# Altium PCB board.PcbDoc
Units mm, origin at the board's own origin, x right, y up, seen from the top; angles counter-clockwise.
Board outline 123 x 60 mm, 2 copper layers (Top Layer, Bottom Layer); 14 components, 7 nets, 45 pads, 1 vias.
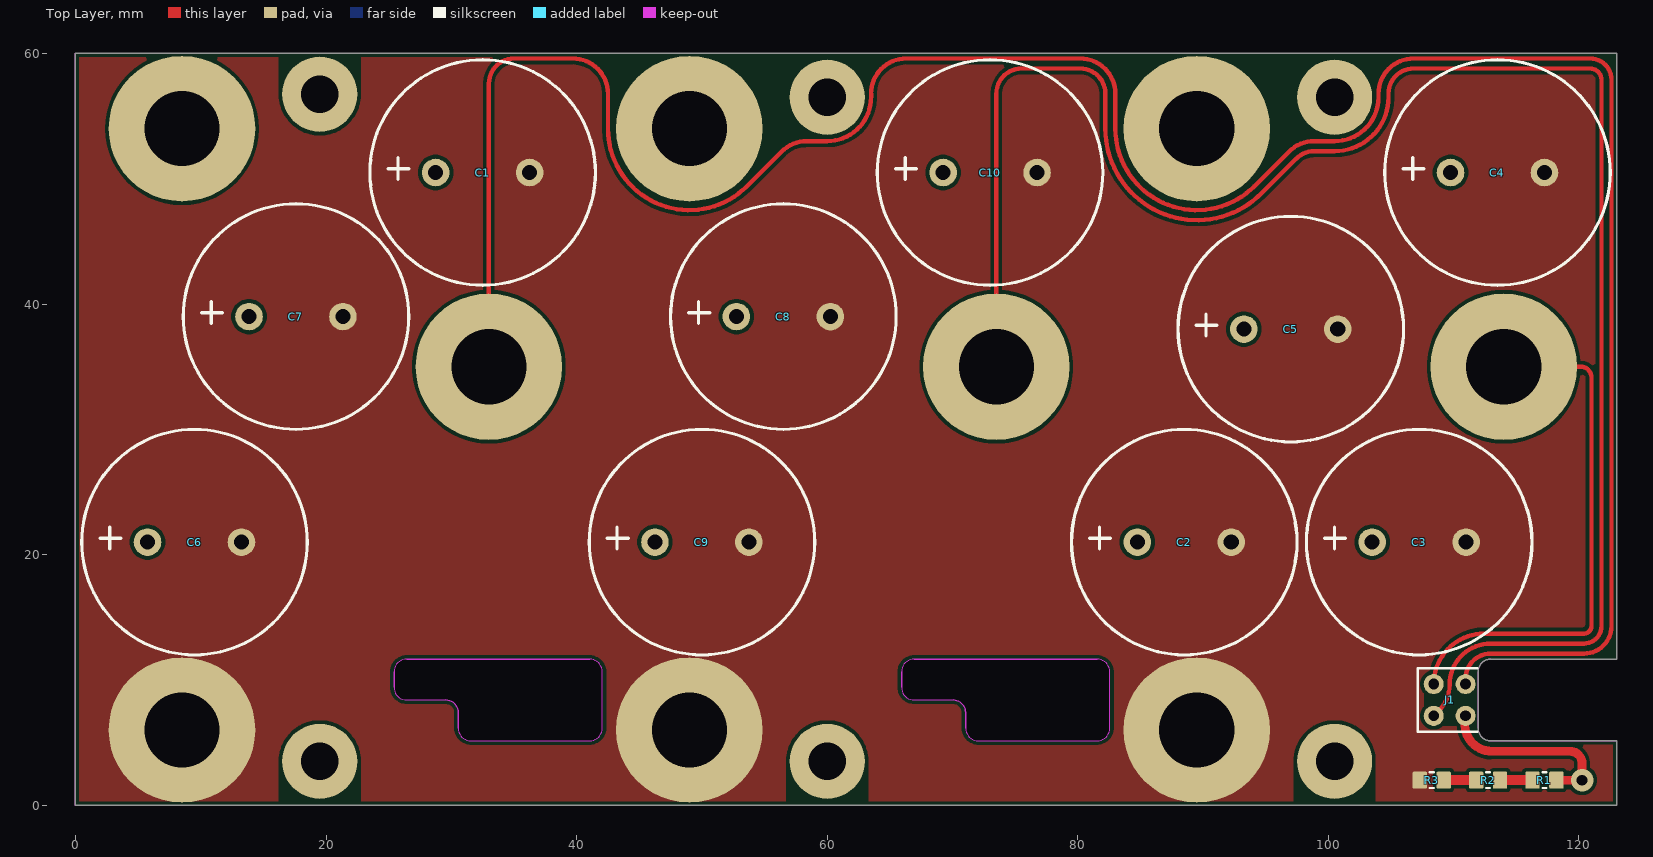
[diagram p0: Top Layer view]
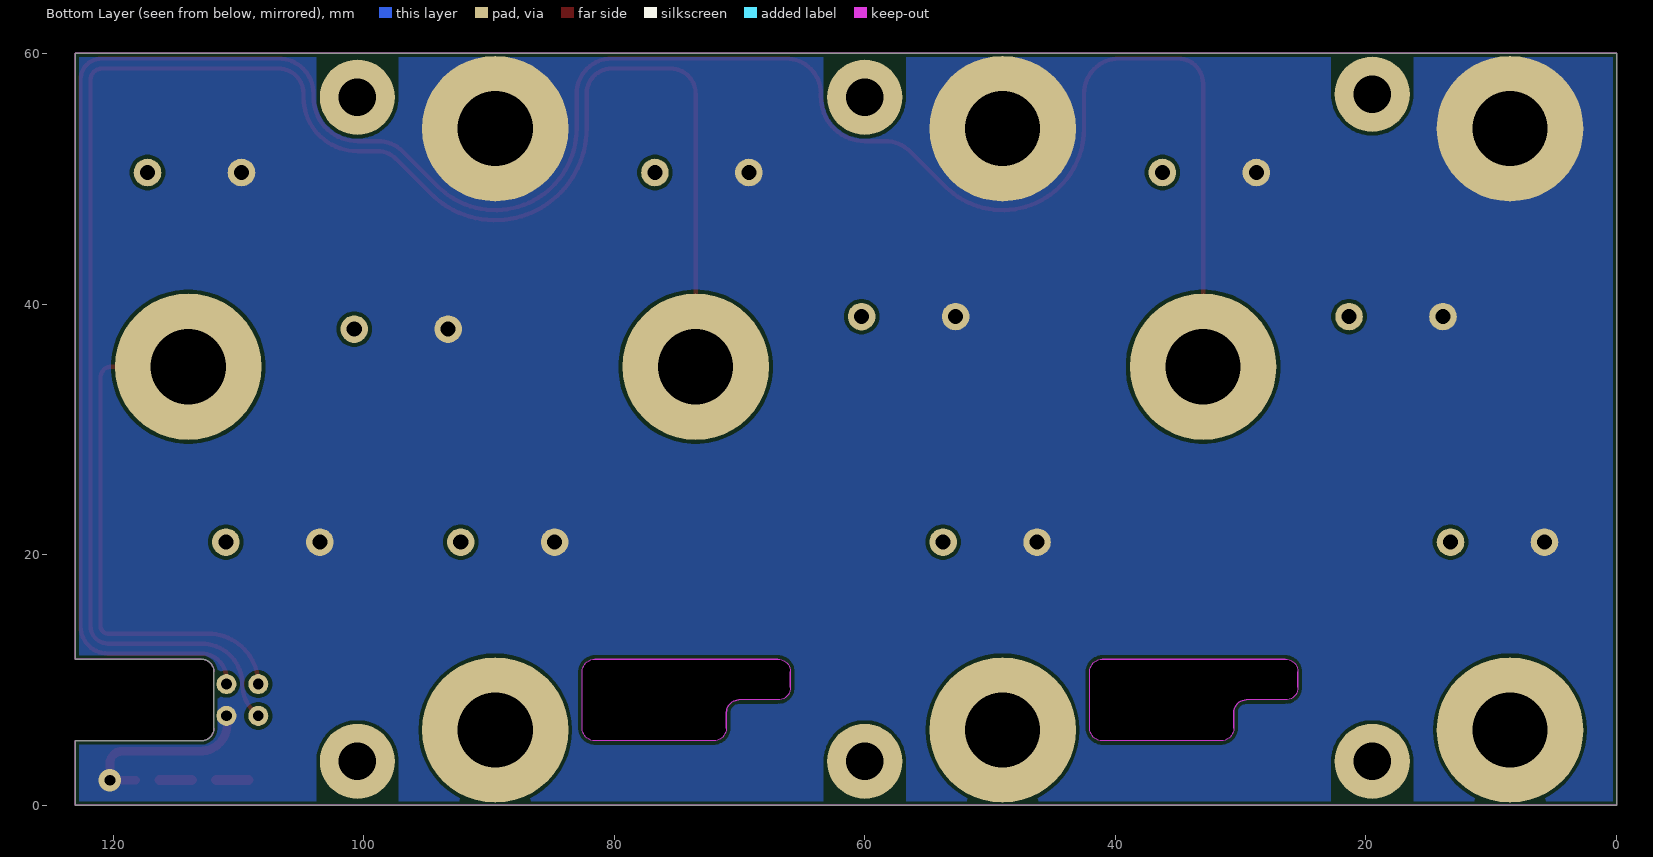
[diagram p1: Bottom Layer view, seen from below]
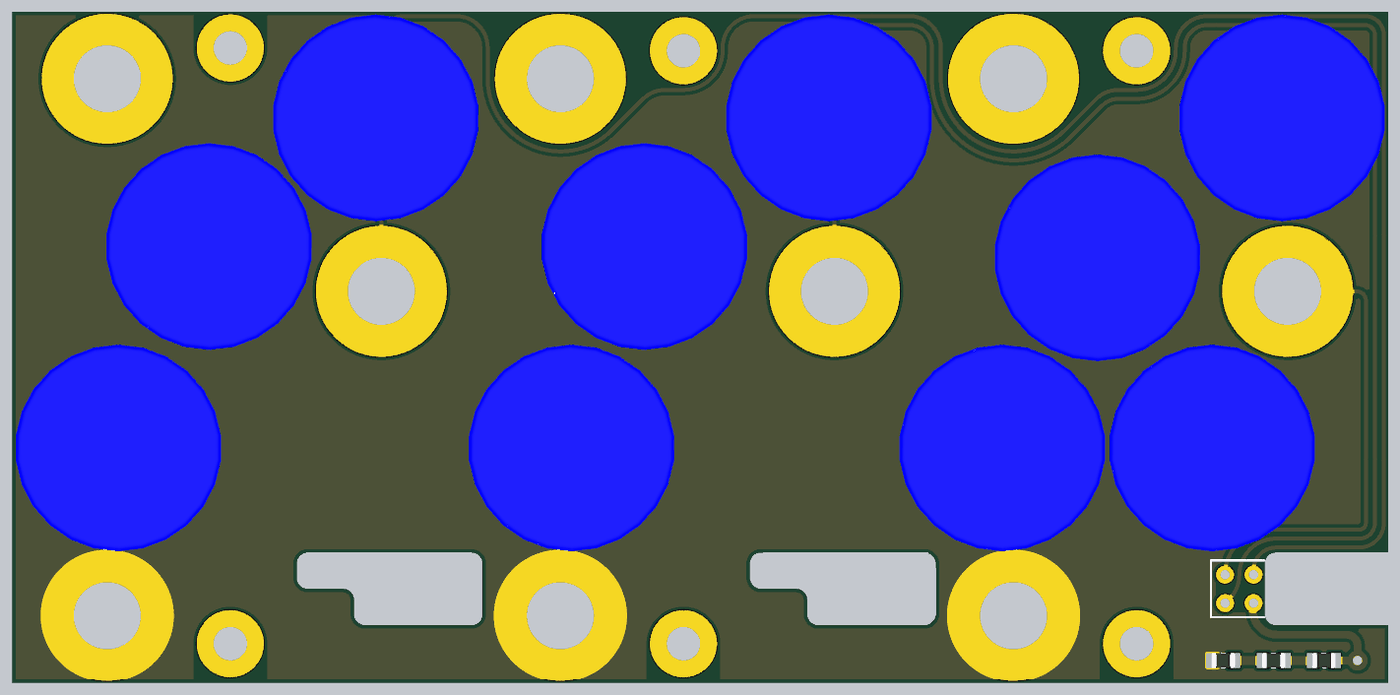
[diagram p2: 3D render of the assembled board from above, using the file's embedded part models]

## Layer stack, top to bottom
Top Solder: solder mask 0.0102, Solder Resist, Dk 3.5
Top Layer: signal copper 0.0356
Dielectric 1: dielectric 0.32, FR-4, Dk 4.8
Bottom Layer: signal copper 0.0356
Bottom Solder: solder mask 0.0102, Solder Resist, Dk 3.5

## Board outline
0,0 0,60 123,60 123,11.65 112.95,11.65 ccw(c112.95,10.65) 111.95,10.65 111.95,6.15 ccw(c112.95,6.15) 112.95,5.15 123,5.15 123,0
cut-out: 72.05,11.65 66.93,11.65 ccw(c66.93,10.65) 65.93,10.65 65.93,9.4 ccw(c66.93,9.4) 66.93,8.4 70.05,8.4 cw(c70.05,7.4) 71.05,7.4 71.05,6.15 ccw(c72.05,6.15) 72.05,5.15 81.55,5.15 ccw(c81.55,6.15) 82.55,6.15 82.55,10.65 ccw(c81.55,10.65) 81.55,11.65
cut-out: 31.55,11.65 26.43,11.65 ccw(c26.43,10.65) 25.43,10.65 25.43,9.4 ccw(c26.43,9.4) 26.43,8.4 29.55,8.4 cw(c29.55,7.4) 30.55,7.4 30.55,6.15 ccw(c31.55,6.15) 31.55,5.15 41.05,5.15 ccw(c41.05,6.15) 42.05,6.15 42.05,10.65 ccw(c41.05,10.65) 41.05,11.65

## Design rules (kind name [scope] priority, off if disabled: settings)
AcuteAngle [All] p1: minimum=6.00000000000000E+0001 checktracksonly=FALSE
Clearance [All] p1: gap=0.18 ignorepadtopadclearanceinfootprint=FALSE except(0.3: Arc-Fill Arc-Poly Arc-Region Track-Fill Track-Poly Track-Region SMDPad-Fill SMDPad-Poly SMDPad-Region THPad-Fill THPad-Poly THPad-Region Via-Fill Via-Poly Via-Region Fill-Fill Fill-Poly Fill-Region Poly-Poly Poly-Region Region-Region)
HoleSize [All] p1: absolutevalues=TRUE maxlimit=6 minlimit=0.7 maxpercent=80.000 minpercent=20.000
MinimumSolderMaskSliver [All] p1 off: minsoldermaskwidth=0.254
PlaneConnect [All] p1: planeconnectstyle=Direct reliefexpansion=0.508 reliefentries=4 reliefconductorwidth=0.254 reliefairgap=0.254
PolygonConnect [All] p1: connectstyle=Direct reliefconductorwidth=0.254 reliefentries=4 polygonreliefangle="90 Angle" airgapwidth=0.254
RoutingLayers [All] p1: top layer_v5=TRUE bottom layer_v5=FALSE
RoutingVias [All] p1: holewidth=0.711 width=1.27 viastyle="Through Hole" minholewidth=0.711 minwidth=0.8 maxholewidth=5 maxwidth=5
SilkToSolderMaskClearance [IsPad] p1 off: minsilkscreentomaskgap=0.254 clearancetoexposedcopper=TRUE
SolderMaskExpansion [All] p1: expansion=0.102 istentingtop=FALSE
UnRoutedNet [All] p1: checkbadconnections=TRUE
Width [All] p1: maxlimit=50 minlimit=0.2 preferedwidth=0.254
24 further rules are at their usual default settings.

## Classes and differential pairs
net class J1_Nets: U V VB W
net class R3_Nets: GND NetR2_2
net class R2_Nets: NetR1_2 NetR2_2
net class R1_Nets: NetR1_2 VB
net class C10_Nets: GND VB
net class C9_Nets: GND VB
net class C8_Nets: GND VB
net class C7_Nets: GND VB
net class C6_Nets: GND VB
net class C5_Nets: GND VB
net class C4_Nets: GND VB
net class C3_Nets: GND VB
net class C2_Nets: GND VB
net class C1_Nets: GND VB

## Components (designator, comment, footprint, x,y, rotation, side; value= is the part's Value field where it differs from the comment)
C1 "220uF" CAP-TH_BD16.0-P7.50-D1.2-FD 32.5,50.5 r0 top
C2 "220uF" CAP-TH_BD16.0-P7.50-D1.2-FD 88.5,21 r0 top
C3 "220uF" CAP-TH_BD16.0-P7.50-D1.2-FD 107.25,21 r0 top
C4 "220uF" CAP-TH_BD16.0-P7.50-D1.2-FD 113.5,50.5 r0 top
C5 "220uF" CAP-TH_BD16.0-P7.50-D1.2-FD 97,38 r0 top
C6 "220uF" CAP-TH_BD16.0-P7.50-D1.2-FD 9.5,21 r0 top
C7 "220uF" CAP-TH_BD16.0-P7.50-D1.2-FD 17.6,39 r0 top
C8 "220uF" CAP-TH_BD16.0-P7.50-D1.2-FD 56.5,39 r0 top
C9 "220uF" CAP-TH_BD16.0-P7.50-D1.2-FD 50,21 r0 top
C10 "220uF" CAP-TH_BD16.0-P7.50-D1.2-FD 73,50.5 r0 top
J1 "HDR2X2" HDR-2X2 109.68,8.4 r0 top
R1 "100k" R0805 117.25,2 r180 top
R2 "100k" R0805 112.75,2 r180 top
R3 "100k" R0805 108.25,2 r180 top

## Footprints (in the part's own frame and the unit in brackets; to place one, negate y for a bottom-side part, rotate by r counter-clockwise, add the part's x,y. Pads: shape width x height; smd on the part's side, far side on the other; paste and mask are expansions set on the pad)
CAP-TH_BD16.0-P7.50-D1.2-FD [mm]
  round 2.2 hole 1.2: 1(-3.75,0) 2(3.75,0)
  silkscreen extent -9,-9 9,9, body extent -9.24,-9.25 9.24,9.25, height 20
HDR-2X2 [mm]
  round 1.6 hole 0.85: 1(-1.27,1.27) 2(1.27,1.27) 3(-1.27,-1.27) 4(1.27,-1.27)
  silkscreen extent -2.54,-2.54 2.21,2.54
R0805 [mil] "Chip Resistor; Body 1.6 x 0.8 mm (LxW typ)"
  rrect15% 45x53.15 smd: 1(-37.5,0) 2(37.5,0)
  silkscreen extent -6,-25 6,25, body extent -41,-27 41,27, height 24

## Part data
C1 C2 C3 C4 C5 C6 C7 C8 C9 C10: "UPW2A221MHD"
J1: library part "Header 2x2"
R1 R2 R3: library part Res1, "100k 0805"

## Free pads (board coordinates)
  oval 11.7x11.6 hole 6: M(8.5,6) M(8.5,54) M(49,6) M(49,54) M(89.5,6) M(89.5,54)
  round 6 hole 3 unplated: M(19.5,3.5) M(19.5,56.75) M(60,3.5) M(60,56.5) M(100.5,3.5) M(100.5,56.5)
  round 11.7 hole 6: U(33,35) V(73.5,35) W(114,35)

## Via types
v1: diameter 1.8, hole 0.85, Top Layer to Bottom Layer, tented both sides, 1 vias

## Nets (pads, with @x,y where several pads share a name; then routed paths per layer and width w, separated by ;. In a path a pad name is that pad's centre, name@x,y a point inside that pad or via, vN(x,y) a via of type N, cw(c..) or ccw(c..) an arc to the next point about the centre after c; other vN are vias at no path point)
GND: C1.2 C2.2 C3.2 C4.2 C5.2 C6.2 C7.2 C8.2 C9.2 C10.2 pad.M@8.5,6 pad.M@49,6 pad.M@89.5,6 R3.2
NetR1_2: R1.2 R2.1 | length 2.6
  Top Layer w0.8: R2.1 R1.2
NetR2_2: R2.2 R3.1 | length 2.6
  Top Layer w0.8: R3.1 R2.2
U: J1.2 pad.U | length 200.1
  Top Layer w0.35: pad.U 33,57.593 cw(c35.007,57.593) 35.007,59.6 39.693,59.6 cw(c39.693,56.793) 42.5,56.793 42.5,54 ccw(c49,54) 53.596,49.404 56.37,52.178 cw(c58.355,50.193) 58.355,53 60,53 ccw(c60,56.5) 63.5,56.5 63.5,56.793 cw(c66.307,56.793) 66.307,59.6 80.193,59.6 cw(c80.193,56.793) 83,56.793 83,54 ccw(c89.5,54) 94.096,49.404 96.87,52.178 cw(c98.855,50.193) 98.855,53 100.5,53 ccw(c100.5,56.5) 104,56.5 104,56.793 cw(c106.807,56.793) 106.807,59.6 120.9,59.6 cw(c120.9,57.9) 122.6,57.9 122.6,14.3 cw(c120.4,14.3) 120.4,12.1 112.957,12.1 ccw(c112.957,10.093) 110.95,10.093 J1.2
V: J1.3 pad.V | length 146.9
  Top Layer w0.35: pad.V 73.5,56.793 cw(c75.507,56.793) 75.507,58.8 80.193,58.8 cw(c80.193,56.793) 82.2,56.793 82.2,54 ccw(c89.5,54) 94.662,48.838 97.436,51.612 cw(c98.855,50.193) 98.855,52.2 100.5,52.2 ccw(c100.5,56.5) 104.8,56.5 104.8,56.793 cw(c106.807,56.793) 106.807,58.8 120.9,58.8 cw(c120.9,57.9) 121.8,57.9 121.8,14.3 cw(c120.4,14.3) 120.4,12.9 112.95,12.9 ccw(c112.95,9.63) 109.68,9.63 cw(c106.71,9.63) 108.81,7.53 J1.3
VB: C1.1 C2.1 C3.1 C4.1 C5.1 C6.1 C7.1 C8.1 C9.1 C10.1 J1.4 pad.M@8.5,54 pad.M@49,54 pad.M@89.5,54 R1.1 | length 15.2
  Top Layer w0.7: J1.4 110.924,6.843 ccw(c113.043,6.459) 113.043,4.305 119.279,4.305 cw(c119.279,3.334) 120.25,3.334 v1(120.25,2) R1.1
W: J1.1 pad.W | length 42.6
  Top Layer w0.35: J1.1 cw(c112.44,9.67) 112.44,13.7 120.4,13.7 ccw(c120.4,14.3) 121,14.3 121,34.152 ccw(c120.152,34.152) 120.152,35 pad.W

## Polygon pours and split planes (outlines as drawn)
GND on Top Layer "NONET_L02_P-001" (solid, remove dead copper, pour order 0): 0,60 0,0 123,0 123,60
VB on Bottom Layer "NONET_L02_P-001" (solid, remove dead copper, pour order 1): 0,60 0,0 123,0 123,60

## Keep-outs
Keep-Out Layer:
  lines w0: 0,0 0,60 123,60 123,11.65 112.95,11.65 ccw(c112.95,10.65) 111.95,10.65 111.95,6.15 ccw(c112.95,6.15) 112.95,5.15 123,5.15 123,0 0,0 ; 25.43,9.4 ccw(c26.43,9.4) 26.43,8.4 29.55,8.4 cw(c29.55,7.4) 30.55,7.4 30.55,6.15 ccw(c31.55,6.15) 31.55,5.15 41.05,5.15 ccw(c41.05,6.15) 42.05,6.15 42.05,10.65 ccw(c41.05,10.65) 41.05,11.65 26.43,11.65 ccw(c26.43,10.65) 25.43,10.65 25.43,9.4 ; 65.93,9.4 ccw(c66.93,9.4) 66.93,8.4 70.05,8.4 cw(c70.05,7.4) 71.05,7.4 71.05,6.15 ccw(c72.05,6.15) 72.05,5.15 81.55,5.15 ccw(c81.55,6.15) 82.55,6.15 82.55,10.65 ccw(c81.55,10.65) 81.55,11.65 66.93,11.65 ccw(c66.93,10.65) 65.93,10.65 65.93,9.4

## Other copper
Top Layer:
  pour cut-out: 108.591,6.3 cw(c108.591,7.291) 107.6,7.291 107.6,9.509 cw(c108.591,9.509) 108.591,10.5 111.95,10.5 111.95,6.3
Multi-Layer:
  pour cut-out: 22.8,60.25 22.8,56.75 cw(c19.5,56.75) 19.5,53.45 19.5,60.25
  pour cut-out: 16.2,60.25 16.2,56.75 ccw(c19.5,56.75) 19.5,53.45 19.5,60.25
  pour cut-out: 56.7,60 56.7,56.5 ccw(c60,56.5) 60,53.2 60,60
  pour cut-out: 63.3,60 63.3,56.5 cw(c60,56.5) 60,53.2 60,60
  pour cut-out: 103.8,60 103.8,56.5 cw(c100.5,56.5) 100.5,53.2 100.5,60
  pour cut-out: 97.2,60 97.2,56.5 ccw(c100.5,56.5) 100.5,53.2 100.5,60
  pour cut-out: 97.2,0 97.2,3.5 cw(c100.5,3.5) 100.5,6.8 100.5,0
  pour cut-out: 103.8,0 103.8,3.5 ccw(c100.5,3.5) 100.5,6.8 100.5,0
  pour cut-out: 56.7,0 56.7,3.5 cw(c60,3.5) 60,6.8 60,0
  pour cut-out: 63.3,0 63.3,3.5 ccw(c60,3.5) 60,6.8 60,0
  pour cut-out: 22.8,0 22.8,3.5 ccw(c19.5,3.5) 19.5,6.8 19.5,0
  pour cut-out: 16.2,0 16.2,3.5 cw(c19.5,3.5) 19.5,6.8 19.5,0